# Altium PCB ALCT_MEZ_LX150T.PcbDoc (part 8 of 9)
Units mil, origin at the board's own origin, x right, y up, seen from the top; angles counter-clockwise.
Board outline 4101.98 x 5875.01 mil, 12 copper layers (Top Layer, Mid-Layer 1, +3V3, Mid-Layer 2, +1V2, Mid-Layer 4, +2V5, Mid-Layer 5, GND1, Mid-Layer 7, GND2, Bottom Layer), stack 64.7 mil thick; 378 components, 616 nets, 2492 pads, 1686 vias.
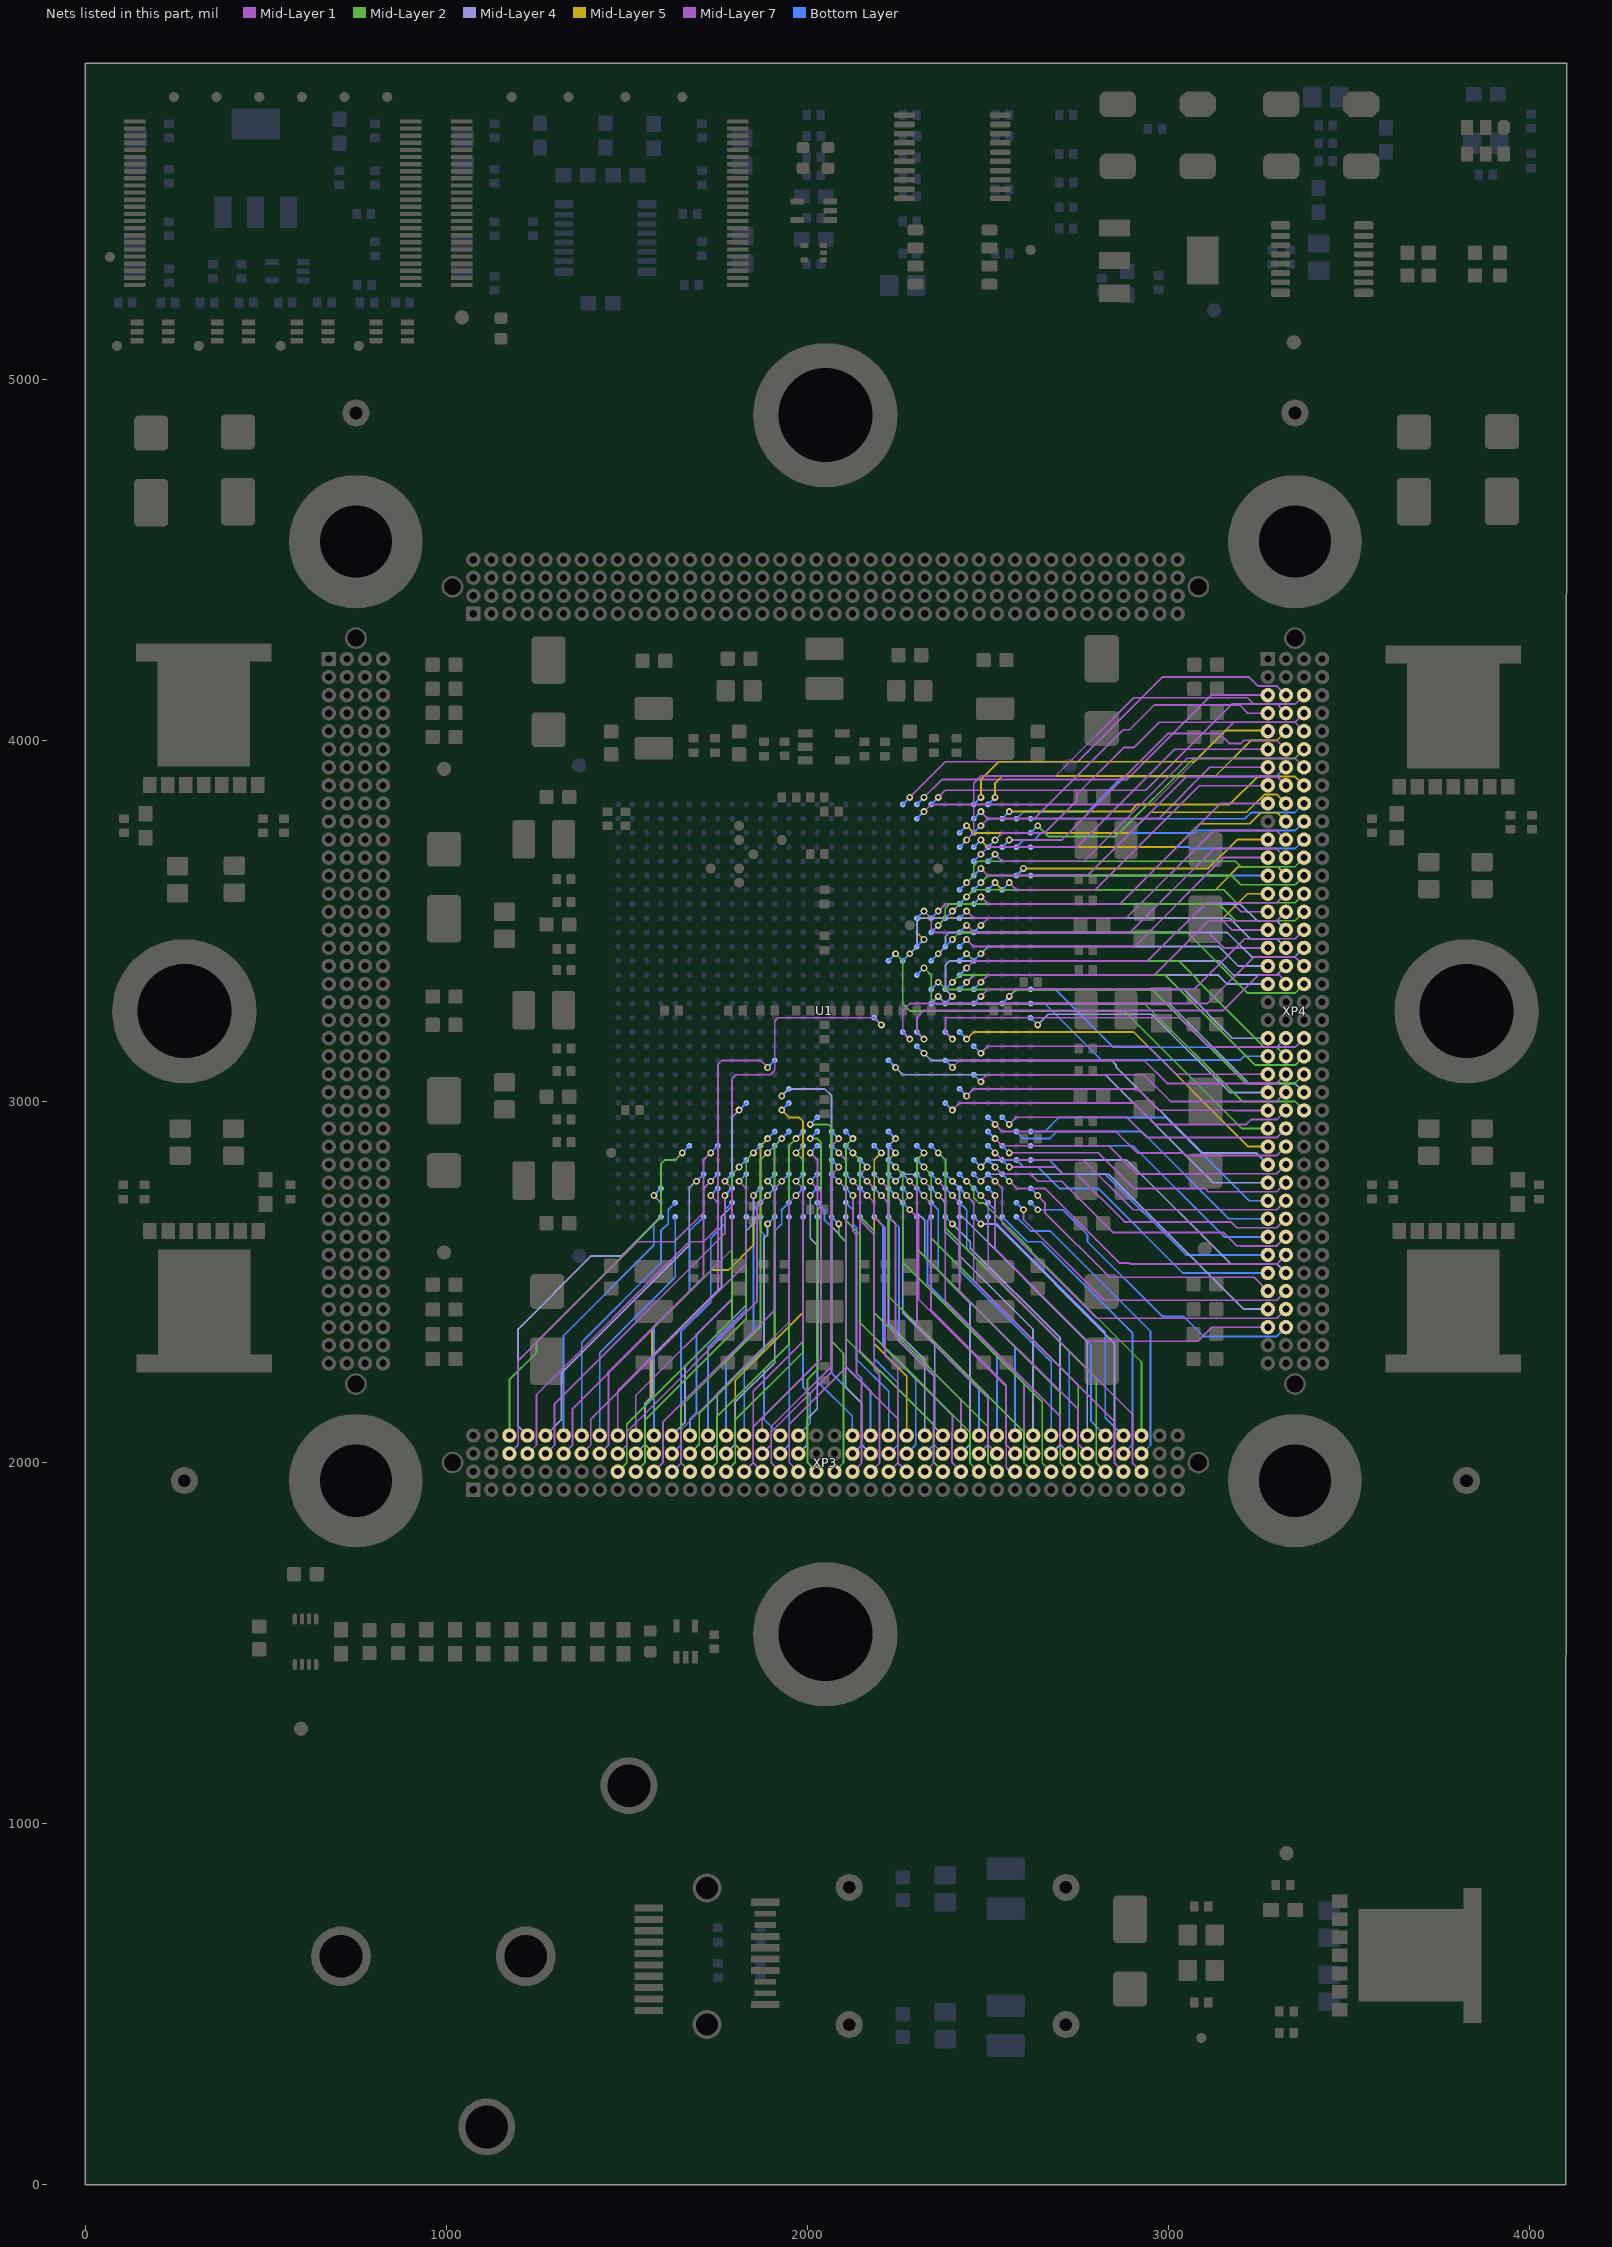
[diagram p17: the nets of this part, all layers, seen from the top]

## Via types
v1: diameter 19, hole 10, Top Layer to Bottom Layer, tented both sides, 1667 vias
v2: diameter 40, hole 20, Top Layer to Bottom Layer, 12 vias
v3: diameter 19, hole 10, Top Layer to Bottom Layer, 7 vias

## Nets (pads, with @x,y where several pads share a name; then routed paths per layer and width w, separated by ;. In a path a pad name is that pad's centre, name@x,y a point inside that pad or via, vN(x,y) a via of type N, cw(c..) or ccw(c..) an arc to the next point about the centre after c; other vN are vias at no path point) (continued)
XP3B_9: U1.AA5 XP3.B9 | length 1011.2
  Mid-Layer 2 w5: XP3.B9@1475,1973.83 XP3.B9@1475.59,1974.42 ; XP3.B9@1475,1975.01 1500,2000.01 1500,2105.7 1791.17,2396.86 1791.17,2798.44 v1(1811.03,2818.3)
  Bottom Layer w6: v1(1811.03,2818.3) U1.AA5@1830.71,2838
XP3B_10: U1.Y6 XP3.B10 | length 1045.3
  Mid-Layer 2 w5: XP3.B10@1525,1975.01 1550,2000.01 1550,2117.35 1830.54,2397.88 1830.54,2837.83 v1(1850.39,2857.68)
  Bottom Layer w6: v1(1850.39,2857.68) U1.Y6@1870.08,2877.37
XP3B_11: U1.V4 XP3.B11 | length 979.3
  Mid-Layer 1 w5: XP3.B11@1574.41,1974.42 XP3.B11@1575,1973.82 ; XP3.B11@1575,1975.01 1600,2000.01 1600,2112.19 1908.76,2420.96 1908.76,2591.93 1909.41,2592.58 1909.41,2759.2 v1(1929.14,2778.93)
  Bottom Layer w6: v1(1929.14,2778.93) U1.V4@1948.83,2798.62
XP3B_12: U1.U3 XP3.B12 | length 936.4
  Mid-Layer 1 w5: XP3.B12@1625,1973.82 1625.98,1973.82 1650,1997.84 1650,2090.34 1949,2389.34 1949,2720.06 v1(1968.51,2739.57)
  Bottom Layer w6: v1(1968.51,2739.57) U1.U3@1988.19,2759.26
XP3B_13: U1.W6 XP3.B13 | length 1021
  Mid-Layer 2 w5: XP3.B13@1674.41,1974.42 XP3.B13@1675,1973.83 ; XP3.B13@1675,1975.01 1650,2000.01 1650,2155.32 1869.9,2375.22 1869.9,2837.81 v1(1889.78,2857.68)
  Bottom Layer w6: v1(1889.78,2857.68) U1.W6@1909.45,2877.37
XP3B_14: U1.U7 XP3.B14 | length 1051.6
  Mid-Layer 2 w5: XP3.B14@1725,1973.83 XP3.B14@1725.59,1974.42 ; XP3.B14@1725,1975.01 1749.5,1999.51 1749.5,2126.87 1948.65,2326.02 1948.65,2877.19 v1(1968.51,2897.05)
  Bottom Layer w6: v1(1968.51,2897.05) U1.U7@1988.19,2916.74
XP3B_15: U1.U6 XP3.B15 | length 1007.7
  Mid-Layer 2 w5: XP3.B15@1775,1973.83 XP3.B15@1775.59,1974.42 ; XP3.B15@1775,1975.01 1800.5,2000.51 1800.5,2118.81 1988.01,2306.32 1988.01,2838.18 v1(1968.51,2857.68)
  Bottom Layer w6: v1(1968.51,2857.68) U1.U6@1988.19,2877.37
XP3B_16: U1.T6 XP3.B16 | length 1002.6
  Mid-Layer 7 w5: XP3.B16@1825,1975.01 1850,2000.01 1850,2099.41 2027.56,2276.98 2027.56,2838.13 v1@2008,2857.68 ; v1(2007.88,2857.68) v1@2007.94,2857.62
  Bottom Layer w6: v1(2007.88,2857.68) U1.T6@2027.56,2877.37
XP3B_17: U1.U4 XP3.B17 | length 907.5
  Mid-Layer 1 w5: XP3.B17@1875,1975.01 1850,2000.01 1850,2197.84 1988.14,2335.98 1988.14,2759.3 v1(1968.51,2778.93)
  Bottom Layer w6: v1(1968.51,2778.93) U1.U4@1988.19,2798.62
XP3B_18: U1.R5 XP3.B18 | length 958.8
  Mid-Layer 1 w5: XP3.B18@1925,1975.01 1900,2000.01 1900,2100.02 2067.11,2267.13 2067.11,2798.79 v1(2086.63,2818.3)
  Bottom Layer w6: U1.R5@2066.93,2838 v1(2086.63,2818.3)
XP3B_19: U1.R4 XP3.B19 | length 914.9
  Mid-Layer 1 w5: XP3.B19@1975,1975.01 1975,1975.2 1950,2000.2 1950,2106.76 2106.14,2262.9 2106.14,2759.43 v1(2086.63,2778.93)
  Bottom Layer w6: U1.R4@2066.94,2798.62 v1(2086.63,2778.93)
XP3B_20: U1.T7 XP3.B20 | length 1000
  Mid-Layer 2 w5: v1(2007.88,2897.05) 2027.56,2897.05 2037.4,2887.21 2037.4,2710.05 2027.74,2700.39 2027.74,2424.61 2027.56,2424.61 2027.56,2257.29 2000.5,2230.23 2000.5,1999.51 XP3.B20@2025,1975.01 ; XP3.B20@2025,1973.83 XP3.B20@2025.59,1974.42
  Bottom Layer w6: v1(2007.88,2897.05) U1.T7@2027.56,2916.74
XP3B_21: U1.T8 XP3.B21 | length 1067.4
  Mid-Layer 2 w5: v1(2007.88,2936.42) 2057.09,2936.42 2066.93,2926.58 2066.93,2336.03 2100,2302.96 2100,2000.01 XP3.B21@2075,1975.01 ; XP3.B21@2075,1973.83 XP3.B21@2075.59,1974.42
  Bottom Layer w6: v1(2007.88,2936.42) U1.T8@2027.56,2956.11
XP3B_22: U1.P3 XP3.B22 | length 813.9
  Mid-Layer 1 w5: XP3.B22@2125,1973.83 2125.59,1974.42 2150,1998.83 2150,2233.27 2135.83,2247.45 2135.83,2631.32 2125.99,2641.15 v1(2125.99,2739.57)
  Bottom Layer w6: U1.P3@2106.3,2759.26 v1(2125.99,2739.57)
XP3B_23: U1.P4 XP3.B23 | length 874
  Mid-Layer 1 w5: v1(2125.99,2778.93) 2145.85,2759.08 2145.85,2670.5 2185.04,2631.3 2185.04,2257.29 2200,2242.33 2200,1998.83 2175.59,1974.42 XP3.B23@2175,1973.83
  Bottom Layer w6: U1.P4@2106.31,2798.62 v1(2125.99,2778.93)
XP3B_24: U1.N3 XP3.B24 | length 838.9
  Mid-Layer 1 w5: v1@2165.48,2739.57 2184.86,2720.18 2184.86,2680.7 2214.57,2650.99 2214.57,2296.66 2250,2261.23 2250,1998.83 2225.59,1974.42 XP3.B24@2225,1973.83
  Bottom Layer w6: U1.N3@2145.68,2759.25 v1(2165.36,2739.57)
XP3B_25: U1.R6 XP3.B25 | length 988.5
  Mid-Layer 7 w5: v1(2086.63,2857.68) 2106.3,2838.01 2106.3,2265.18 2250,2121.48 2250,2000.01 XP3.B25@2275,1975.01
  Bottom Layer w6: U1.R6@2066.93,2877.37 v1(2086.63,2857.68)
XP3B_26: U1.M3 XP3.B26 | length 865.8
  Mid-Layer 1 w5: v1(2204.73,2739.57) 2224.41,2719.89 2224.41,2680.52 2244.09,2660.83 2244.09,2345.87 2350,2239.97 2350,1998.82 XP3.B26@2325.59,1974.41 ; XP3.B26@2326.18,1975.01 XP3.B26@2325.59,1974.42 ; XP3.B26@2325.59,1974.42 2325,1973.83 XP3.B26@2325.59,1974.41
  Bottom Layer w6: U1.M3@2185.04,2759.26 v1(2204.73,2739.57)
XP3B_27: U1.R1 XP3.B27 | length 836.4
  Mid-Layer 2 w5: v1(2086.61,2660.82) 2086.61,2631.3 2106.3,2611.62 2106.3,2343.71 2200,2250.01 2204.12,2250.01 2349.5,2104.62 2349.5,2000.51 XP3.B27@2375,1975.01 ; XP3.B27@2374.41,1974.42 XP3.B27@2375,1973.83
  Bottom Layer w6: U1.R1@2066.93,2680.52 v1@2086.61,2660.83
XP3B_28: U1.N4 XP3.B28 | length 940.2
  Mid-Layer 7 w5: v1(2165.36,2778.93) 2185.04,2759.25 2185.04,2347.82 2401.57,2131.29 2401.57,2086.23 2400.5,2085.16 2400.5,1999.51 XP3.B28@2425,1975.01
  Bottom Layer w6: U1.N4@2145.68,2798.62 v1(2165.36,2778.93)
XP3B_29: U1.P7 XP3.B29 | length 1114
  Mid-Layer 2 w5: v1(2125.99,2897.05) 2106.49,2877.54 2106.49,2731.49 2107.22,2730.75 2107.22,2669.75 2145.67,2631.3 2145.67,2387.19 2236.02,2296.84 2237.81,2296.84 2450,2084.66 2450,1998.83 XP3.B29@2473.82,1975.01 ; XP3.B29@2475,1973.83 XP3.B29@2473.82,1975.01 ; XP3.B29@2475,1975.01 XP3.B29@2473.82,1975.01
  Bottom Layer w6: U1.P7@2106.3,2916.74 v1(2125.99,2897.05)
XP3B_30: U1.P6 XP3.B30 | length 1076.7
  Mid-Layer 2 w5: v1(2125.99,2857.68) 2145.85,2837.83 2145.85,2680.34 2185.04,2641.15 2185.04,2414.77 2499.82,2099.99 2500,2099.99 2500,2000.01 XP3.B30@2525,1975.01 ; XP3.B30@2524.41,1974.42 XP3.B30@2525,1973.83
  Bottom Layer w6: U1.P6@2106.3,2877.37 v1(2125.99,2857.68)
XP3B_31: U1.K2 XP3.B31 | length 882.9
  Mid-Layer 2 w5: XP3.B31@2574.41,1974.42 XP3.B31@2575,1973.83
  Mid-Layer 7 w5: v1(2283.46,2700.2) 2308.07,2675.59 2308.07,2451.68 2550.5,2209.25 2550.5,1985.33 2560.83,1975.01 XP3.B31@2575,1975.01
  Bottom Layer w6: U1.K2@2263.78,2719.89 v1(2283.46,2700.2)
XP3B_32: U1.L6 XP3.B32 | length 1087
  Mid-Layer 2 w5: v1(2244.09,2857.68) 2224.59,2838.18 2224.59,2460.07 2600.5,2084.16 2600.5,2075.2 ; 2600,2075.2 2600,1998.83 XP3.B32@2623.82,1975.01 ; XP3.B32@2625,1973.83 XP3.B32@2623.82,1975.01 ; XP3.B32@2625,1975.01 XP3.B32@2623.82,1975.01
  Bottom Layer w6: U1.L6@2224.41,2877.37 v1(2244.09,2857.68)
XP3B_33: U1.L5 XP3.B33 | length 1052.6
  Mid-Layer 2 w5: v1(2244.09,2818.3) 2263.96,2798.43 2263.96,2708.28 2263.96,2692.13 2263.96,2554.33 2561.19,2257.1 2562.21,2257.1 2573.63,2245.68 2573.63,2244.66 2650,2168.3 2650,1998.83 XP3.B33@2673.82,1975.01 ; XP3.B33@2675,1973.83 XP3.B33@2673.82,1975.01 ; XP3.B33@2675,1975.01 XP3.B33@2673.82,1975.01
  Bottom Layer w6: U1.L5@2224.41,2838 v1(2244.09,2818.3)
XP3B_34: U1.J6 XP3.B34 | length 1095.6
  Mid-Layer 2 w5: v1(2322.84,2857.68) 2303.33,2838.17 2303.33,2591.76 2700,2195.08 2700,1998.83 XP3.B34@2723.82,1975.01 ; XP3.B34@2725,1973.83 XP3.B34@2723.82,1975.01 ; XP3.B34@2725,1975.01 XP3.B34@2723.82,1975.01
  Bottom Layer w6: U1.J6@2303.15,2877.37 v1(2322.84,2857.68)
XP3B_35: U1.J5 XP3.B35 | length 1059.3
  Mid-Layer 2 w5: v1(2322.84,2818.3) 2342.7,2798.44 2342.7,2621.28 2750,2213.98 2750,2000.01 XP3.B35@2775,1975.01 ; XP3.B35@2774.41,1974.42 XP3.B35@2775,1973.83
  Bottom Layer w6: U1.J5@2303.15,2838 v1(2322.84,2818.3)
XP3B_36: U1.H6 XP3.B36 | length 1103
  Mid-Layer 2 w5: v1(2362.21,2857.68) 2382.07,2837.83 2382.07,2650.81 2800,2232.88 2800,2000.01 XP3.B36@2825,1975.01 ; XP3.B36@2824.41,1974.42 XP3.B36@2825,1973.83
  Bottom Layer w6: U1.H6@2342.52,2877.37 v1(2362.21,2857.68)
XP3B_37: U1.F3 XP3.B37 | length 975.1
  Mid-Layer 1 w5: v1(2440.94,2739.57) 2460.63,2719.88 2460.63,2503.35 2850.5,2113.48 2850,2112.98 2850,2000.01 XP3.B37@2875,1975.01 ; XP3.B37@2875.59,1974.41 2875,1973.82 XP3.B37@2876.18,1975.01
  Bottom Layer w6: U1.F3@2421.26,2759.26 v1(2440.94,2739.57)
XP3B_38: U1.E3 XP3.B38 | length 977.4
  Mid-Layer 1 w5: v1(2480.33,2739.57) 2500.7,2719.2 2500.7,2533.96 2900,2134.66 2900,2000.01 XP3.B38@2925,1975.01 ; XP3.B38@2925,1973.82 XP3.B38@2925.59,1974.41
  Bottom Layer w6: U1.E3@2460.63,2759.26 v1(2480.33,2739.57)
XP3C_3: U1.AC4 XP3.C3 | length 1074.2
  Mid-Layer 1 w5: XP3.C3@1174.41,2024.42 XP3.C3@1175,2023.82 ; XP3.C3@1175,2025.01 1199.5,2049.51 1199.5,2247.45 1198.51,2248.43 1198.51,2280.47 1529.66,2611.62 1631.92,2611.62 1712.79,2692.49 1712.79,2759.43 v1(1732.29,2778.93)
  Bottom Layer w6: v1(1732.29,2778.93) U1.AC4@1751.98,2798.62
XP3C_4: U1.AC3 XP3.C4 | length 992.9
  Mid-Layer 1 w5: XP3.C4@1225,2023.82 1250,2048.82 1250,2188.39 1673.04,2611.43 1712.41,2611.43 1751.8,2650.82 1751.8,2720.06 v1(1732.29,2739.57)
  Bottom Layer w6: v1(1732.29,2739.57) U1.AC3@1751.98,2759.25
XP3C_5: U1.AB3 XP3.C5 | length 950.1
  Mid-Layer 1 w5: XP3.C5@1274.41,2024.42 1275,2023.83 1300,2048.82 1300,2162.62 1771.66,2634.28 v1(1771.66,2739.57)
  Bottom Layer w6: v1(1771.66,2739.57) U1.AB3@1791.34,2759.26
XP3C_6: U1.AB4 XP3.C6 | length 983
  Mid-Layer 1 w5: XP3.C6@1325,2025.01 1350,2050.01 1350,2148.65 1791.29,2589.94 1791.29,2759.3 v1(1771.66,2778.93)
  Bottom Layer w6: v1(1771.66,2778.93) U1.AB4@1791.34,2798.62
XP3C_7: U1.AA4 XP3.C7 | length 979.7
  Mid-Layer 1 w5: XP3.C7@1375,2023.82 1400,2048.82 1400,2119.91 1830.53,2550.44 1830.53,2759.43 v1(1811.03,2778.93)
  Bottom Layer w6: v1(1811.03,2778.93) U1.AA4@1830.71,2798.62
XP3C_8: U1.AC6 XP3.C8 | length 987.8
  Mid-Layer 7 w5: XP3.C8@1425,2025.01 1449.5,2049.51 1449.5,2252.05 1712.6,2515.14 1712.6,2837.99 v1(1732.29,2857.68)
  Bottom Layer w6: v1(1732.29,2857.68) U1.AC6@1751.98,2877.37
XP3C_9: U1.W3 XP3.C9 | length 915.4
  Mid-Layer 1 w5: XP3.C9@1475,2023.82 1475.59,2024.41 1500,2048.82 1500,2084.66 1860.24,2444.89 1860.24,2710.03 v1(1889.78,2739.57)
  Bottom Layer w6: v1(1889.78,2739.57) U1.W3@1909.45,2759.26
XP3C_10: U1.AA9 XP3.C10 | length 1097.1
  Mid-Layer 4 w5: XP3.C10@1525,2025.01 1550.01,2050.02 1550.01,2163.6 1564.78,2178.36 1564.78,2288.58 1761.81,2485.62 1761.81,2680.52 1791.34,2710.05 1791.34,2956.09 v1(1811.03,2975.78)
  Bottom Layer w6: v1(1811.03,2975.78) U1.AA9@1830.71,2995.48
XP3C_11: U1.W7 XP3.C11 | length 1078.3
  Mid-Layer 5 w5: XP3.C11@1575,2025.01 1550.5,2049.51 1550.5,2164.09 1569.88,2183.47 1569.88,2368.53 1734.23,2532.88 1781.5,2532.88 1850.39,2601.78 1850.39,2670.67 1870.08,2690.36 1870.08,2877.35 v1(1889.78,2897.05)
  Bottom Layer w6: v1(1889.78,2897.05) U1.W7@1909.45,2916.74
XP3C_12: U1.AB2 XP3.C12 | length 764.6
  Bottom Layer w5: XP3.C12@1625,2023.83 XP3.C12@1625.59,2024.42 ; XP3.C12@1625,2025.01 1650,2050.01 1650,2362.01 1732.28,2444.3 1732.28,2621.46 1771.65,2660.83 1771.65,2700.19 U1.AB2@1791.34,2719.89
XP3C_13: U1.V7 XP3.C13 | length 1005.2
  Mid-Layer 2 w5: XP3.C13@1675,2025.01 1700.5,2050.51 1700.5,2136.92 1909.28,2345.71 1909.28,2877.19 v1(1929.14,2897.05)
  Bottom Layer w6: v1(1929.14,2897.05) U1.V7@1948.82,2916.74
XP3C_14: U1.W1 XP3.C14 | length 731.9
  Mid-Layer 4 w5: XP3.C14@1725,2025.01 1750.5,2050.51 1750.5,2190.84 1879.92,2320.26 1879.92,2621.46 1889.76,2631.3 v1(1889.76,2660.83)
  Bottom Layer w6: v1(1889.76,2660.83) U1.W1@1909.45,2680.52
XP3C_15: U1.W4 XP3.C15 | length 845.6
  Mid-Layer 4 w5: XP3.C15@1775,2025.01 1800.5,2050.51 1800.5,2168.03 1909.45,2276.97 1909.45,2759.26 v1(1889.78,2778.93)
  Bottom Layer w6: v1(1889.78,2778.93) U1.W4@1909.46,2798.62
XP3C_16: U1.V9 XP3.C16 | length 1108.2
  Mid-Layer 5 w5: XP3.C16@1824.41,2024.42 XP3.C16@1825,2023.83 ; XP3.C16@1825,2025.01 1800,2050.01 1800,2227.26 1987.51,2414.77 1987.51,2670.67 1988.01,2671.17 1988.01,2944.28 1988,2944.5 1976.58,2955.92 1949,2955.92 v1(1929.14,2975.78)
  Bottom Layer w6: v1(1929.14,2975.78) U1.V9@1948.82,2995.48
XP3C_17: U1.R7 XP3.C17 | length 987.5
  Mid-Layer 7 w5: XP3.C17@1875,2025.01 1900,2050.01 1900,2084.66 2066.93,2251.59 2066.93,2877.35 v1(2086.63,2897.05)
  Bottom Layer w6: U1.R7@2066.93,2916.74 v1(2086.63,2897.05)
XP3C_18: U1.V1 XP3.C18 | length 667.2
  Bottom Layer w5: XP3.C18@1925,2023.83 XP3.C18@1925.59,2024.42 ; XP3.C18@1925,2025.01 1950,2050.01 1950,2679.34 U1.V1@1948.82,2680.52
XP3C_19: U1.T3 XP3.C19 | length 772.2
  Mid-Layer 4 w5: XP3.C19@1975,2025.01 1999.5,2049.51 1999.5,2120.96 2027.37,2148.84 2027.37,2601.96 2007.88,2621.45 v1(2007.88,2739.58)
  Bottom Layer w6: v1(2007.88,2739.58) U1.T3@2027.56,2759.26
XP3C_22: U1.T2 XP3.C22 | length 758
  Bottom Layer w5: U1.T2@2027.56,2719.89 2047.19,2700.26 2047.19,2672.67 2066.93,2652.93 2066.93,2247.45 2150,2164.38 2150,2048.82 2125,2023.82 XP3.C22@2124.41,2024.42
XP3C_23: U1.V10 XP3.C23 | length 1216.7
  Mid-Layer 4 w5: v1(1929.14,3015.15) 1948.62,3034.65 2047.44,3034.65 2066.93,3015.16 2066.93,2652.93 2106.3,2613.56 2106.3,2208.08 2150.5,2163.88 2150.5,2049.51 XP3.C23@2175,2025.01
  Bottom Layer w6: v1(1929.14,3015.15) U1.V10@1948.82,3034.85
XP3C_24: U1.N1 XP3.C24 | length 711.1
  Bottom Layer w5: U1.N1@2145.67,2680.52 2184.85,2641.33 2184.85,2287 2250,2221.86 2250,2048.82 2225,2023.82 XP3.C24@2224.41,2024.42
XP3C_25: U1.M1 XP3.C25 | length 713.5
  Bottom Layer w5: U1.M1@2185.04,2680.52 2209.65,2655.92 2209.65,2321.27 2300,2230.91 2300,2050.01 XP3.C25@2275,2025.01
XP3C_26: U1.L1 XP3.C26 | length 718.7
  Bottom Layer w5: U1.L1@2224.41,2680.52 2253.94,2650.99 2253.94,2336.03 2350,2239.97 2350,2050.01 XP3.C26@2325,2025.01 ; XP3.C26@2324.41,2024.42 XP3.C26@2325,2023.82
XP3C_27: U1.N5 XP3.C27 | length 924.1
  Mid-Layer 7 w5: v1(2165.36,2818.3) 2145.85,2798.79 2145.85,2308.27 2350.5,2103.62 2350.5,2049.51 XP3.C27@2375,2025.01
  Bottom Layer w6: U1.N5@2145.68,2837.98 v1(2165.36,2818.3)
XP3C_28: U1.L4 XP3.C28 | length 932.8
  Mid-Layer 4 w5: v1(2244.09,2778.93) 2263.59,2798.43 2291.55,2798.43 2302.98,2787.01 2302.98,2692.49 2324.79,2670.68 2324.79,2568.35 2450,2443.13 2450,2050.01 XP3.C28@2425,2025.01
  Bottom Layer w6: U1.L4@2224.41,2798.62 v1(2244.09,2778.93)
XP3C_29: U1.K3 XP3.C29 | length 858.2
  Mid-Layer 7 w5: v1(2283.48,2739.57) 2263.96,2720.05 2263.96,2421.46 2499.5,2185.92 2499.5,2049.51 XP3.C29@2475,2025.01
  Bottom Layer w6: U1.K3@2263.78,2759.26 v1(2283.48,2739.57)
XP3C_30: U1.K4 XP3.C30 | length 881.8
  Mid-Layer 1 w5: v1(2283.48,2778.93) 2303.11,2759.3 2303.11,2375.44 2500,2178.55 2500,2050.01 XP3.C30@2525,2025.01
  Bottom Layer w6: U1.K4@2263.79,2798.62 v1(2283.48,2778.93)
XP3C_31: U1.J3 XP3.C31 | length 848.5
  Mid-Layer 1 w5: v1(2322.84,2739.57) 2322.84,2737.04 2342.52,2717.36 2342.52,2421.64 2550,2214.16 2550,2050.01 XP3.C31@2575,2025.01 ; XP3.C31@2574.41,2024.42 2575,2023.82 XP3.C31@2575.59,2024.42
  Bottom Layer w6: U1.J3@2303.15,2759.26 v1(2322.84,2739.57)
XP3C_32: U1.J4 XP3.C32 | length 906.9
  Mid-Layer 7 w5: v1(2322.84,2778.93) 2342.52,2759.26 2342.52,2476.8 2600,2219.32 2600,2050.01 XP3.C32@2625,2025.01
  Bottom Layer w6: U1.J4@2303.16,2798.62 v1(2322.84,2778.93)
XP3C_33: U1.G1 XP3.C33 | length 797.2
  Mid-Layer 4 w5: v1(2401.57,2660.83) 2450.79,2611.62 2450.79,2593.89 2699.5,2345.17 2699.5,2049.51 XP3.C33@2675,2025.01
  Bottom Layer w5: U1.G1@2381.89,2680.52 v1(2401.57,2660.83)
XP3C_34: U1.H4 XP3.C34 | length 932.9
  Mid-Layer 1 w5: v1(2362.21,2778.93) 2381.84,2759.3 2381.84,2446.3 2699.5,2128.64 2699.5,2050.51 XP3.C34@2725,2025.01 ; XP3.C34@2724.41,2024.42 XP3.C34@2725,2023.82
  Bottom Layer w6: U1.H4@2342.53,2798.62 v1(2362.21,2778.93)
XP3C_35: U1.G3 XP3.C35 | length 897.9
  Mid-Layer 1 w5: v1(2401.58,2739.57) 2401.58,2738.45 2421.08,2718.95 2421.08,2475.95 2749.5,2147.54 2749.5,2050.51 XP3.C35@2775,2025.01 ; XP3.C35@2775,2023.83 XP3.C35@2775.59,2024.42
  Bottom Layer w6: U1.G3@2381.89,2759.26 v1(2401.58,2739.57)
XP3C_36: U1.E1 XP3.C36 | length 850.5
  Mid-Layer 4 w5: v1(2480.32,2660.83) 2519.68,2660.83 2850,2330.52 2850,2050.01 XP3.C36@2825,2025.01
  Bottom Layer w5: U1.E1@2460.82,2680.33 U1.E1@2460.63,2680.52 v1(2480.32,2660.83)
XP3C_37: U1.C1 XP3.C37 | length 840.3
  Bottom Layer w5: U1.C1@2539.37,2680.52 2608.27,2611.62 2647.64,2611.62 2900,2359.26 2900,2048.82 2875,2023.82 XP3.C37@2875.59,2024.42
XP3C_38: U1.B1 XP3.C38 | length 853.4
  Bottom Layer w5: U1.B1@2578.74,2680.52 2617.93,2641.33 2672.06,2641.33 2950,2363.39 2950,2048.82 2925,2023.82 XP3.C38@2925.59,2024.42
XP3D_3: U1.AE6 XP3.D3 | length 1024.9
  Mid-Layer 2 w5: XP3.D3@1175,2075.01 1175,2229.49 1250,2304.49 1250,2334.08 1594.49,2678.57 1594.49,2826.19 1606.1,2837.8 1633.68,2837.8 v1(1653.56,2857.68)
  Bottom Layer w6: v1(1653.56,2857.68) U1.AE6@1673.23,2877.37
XP3D_4: U1.AG3 XP3.D4 | length 924.6
  Mid-Layer 4 w5: XP3.D4@1225,2075.01 1199,2101 1199,2369.68 1401.57,2572.25 1486.22,2572.25 1594.31,2680.34 1594.31,2720.06 v1(1574.81,2739.57)
  Bottom Layer w6: v1(1574.81,2739.57) U1.AG3@1594.49,2759.26
XP3D_5: U1.AD4 XP3.D5 | length 903.8
  Mid-Layer 4 w5: XP3.D5@1275,2075.01 1318.9,2118.9 1318.9,2247.71 1673.06,2601.88 1673.06,2761.48 v1@1690.43,2778.85
  Bottom Layer w6: v1(1692.93,2778.93) U1.AD4@1712.61,2798.62
XP3D_6: U1.AG1 XP3.D6 | length 718.3
  Bottom Layer w5: XP3.D6@1325,2073.82 XP3.D6@1325,2075.01 1325,2351.97 1574.8,2601.78 1574.8,2660.83 U1.AG1@1594.49,2680.52
XP3D_7: U1.AF2 XP3.D7 | length 753.3
  Bottom Layer w5: XP3.D7@1375,2073.82 XP3.D7@1375,2075.01 1375,2333.08 1594.49,2552.56 1594.49,2641.83 1614.5,2661.84 1614.5,2700.53 U1.AF2@1633.86,2719.89
XP3D_8: U1.AF1 XP3.D8 | length 693.2
  Bottom Layer w5: XP3.D8@1425,2073.82 XP3.D8@1425,2075.01 1425,2304.34 1633.86,2513.19 U1.AF1@1633.86,2680.52
XP3D_9: U1.W12 XP3.D9 | length 1320
  Mid-Layer 7 w5: XP3.D9@1475,2075.01 1475,2198.81 1752.16,2475.97 1752.16,3101.98 1763.58,3113.4 1870.28,3113.4 v1(1889.78,3093.9)
  Bottom Layer w6: v1(1889.78,3093.9) U1.W12@1909.45,3113.59
XP3D_10: U1.M15 XP3.D10 | length 1696.7
  Mid-Layer 7 w5: XP3.D10@1525,2075.01 1525,2185.85 1791.53,2452.38 1791.53,2583.85 1791.52,2600.01 1791.53,3062.61 1802.95,3074.03 1897.49,3074.03 1909.64,3086.19 1909.64,3222.05 1919.09,3231.5 2185.23,3231.5 v1(2204.73,3212)
  Bottom Layer w6: U1.M15@2185.04,3231.7 v1(2204.73,3212)
XP3D_11: U1.AD1 XP3.D11 | length 663.7
  Bottom Layer w5: XP3.D11@1575,2073.82 XP3.D11@1575,2075.01 1575,2375.6 1673.23,2473.82 1673.23,2641.15 U1.AD1@1712.6,2680.52
XP3D_12: U1.Y3 XP3.D12 | length 785.8
  Mid-Layer 4 w5: XP3.D12@1625,2075.01 1661.44,2111.44 1661.44,2267.13 1830.71,2436.4 1830.71,2641.15 1850.39,2660.83 v1(1850.39,2739.57)
  Bottom Layer w6: v1(1850.39,2739.57) U1.Y3@1870.08,2759.26
XP3D_13: U1.AB1 XP3.D13 | length 654.5
  Bottom Layer w5: XP3.D13@1675,2073.82 XP3.D13@1675.59,2074.41 ; XP3.D13@1675,2075.01 1675,2121.27 1692.91,2139.18 1692.91,2355.71 1791.34,2454.14 U1.AB1@1791.34,2680.52
XP3D_14: U1.AA1 XP3.D14 | length 649.3
  Bottom Layer w5: XP3.D14@1725,2075.01 1725,2318.9 1830.71,2424.61 U1.AA1@1830.71,2680.52
XP3D_15: U1.Y2 XP3.D15 | length 685.4
  Bottom Layer w5: XP3.D15@1775,2073.82 XP3.D15@1775,2075.01 1775,2287.19 1850.39,2362.59 1850.39,2700.2
  Bottom Layer w6: 1850.39,2700.2 U1.Y2@1870.08,2719.89
XP3D_16: U1.Y1 XP3.D16 | length 633.2
  Bottom Layer w5: XP3.D16@1825,2073.82 XP3.D16@1825.59,2074.41 ; XP3.D16@1825,2075.01 1825,2256.5 1879.92,2311.42 1879.92,2631.3 1870.08,2641.15 U1.Y1@1870.08,2680.52
XP3D_17: U1.T4 XP3.D17 | length 811.3
  Mid-Layer 1 w5: XP3.D17@1875,2075.01 1875,2124.41 2037.4,2286.82 2037.4,2749.42 v1(2007.88,2778.93)
  Bottom Layer w6: v1(2007.88,2778.93) U1.T4@2027.56,2798.62
XP3D_18: U1.V2 XP3.D18 | length 693.3
  Bottom Layer w5: XP3.D18@1925,2073.82 XP3.D18@1925,2075.01 1879.92,2120.08 1879.92,2257.1 1909.63,2286.82 1909.63,2641.33 1929.15,2660.84 1929.15,2700.2
  Bottom Layer w6: 1929.15,2700.2 U1.V2@1948.82,2719.89
XP3D_19: U1.U1 XP3.D19 | length 627.3
  Bottom Layer w5: XP3.D19@1975,2075.01 1975,2076.78 2007.87,2109.65 2007.87,2188.39 1988.19,2208.08 U1.U1@1988.19,2680.52
XP3D_22: U1.T1 XP3.D22 | length 647.1
  Bottom Layer w5: U1.T1@2027.56,2680.52 2027.56,2225.81 2124.41,2128.96 2124.41,2074.42 XP3.D22@2125,2073.82
XP3D_23: U1.P1 XP3.D23 | length 635.2
  Bottom Layer w5: U1.P1@2106.3,2680.52 2106.3,2267.13 2175,2198.43 XP3.D23@2175,2075.01 XP3.D23@2175,2073.82
XP3D_24: U1.P2 XP3.D24 | length 695.2
  Bottom Layer w5: U1.P2@2106.3,2719.89 2125.98,2700.2 2125.98,2660.83 2135.83,2650.99 2135.83,2286.82 2225,2197.64 XP3.D24@2225,2075.01 XP3.D24@2225,2073.82
XP3D_25: U1.M6 XP3.D25 | length 855.9
  Mid-Layer 5 w5: v1(2204.73,2857.68) 2185.04,2837.99 2185.04,2328.65 2275,2238.69 XP3.D25@2275,2075.01
  Bottom Layer w6: U1.M6@2185.04,2877.37 v1(2204.73,2857.68)
XP3D_26: U1.L7 XP3.D26 | length 900.9
  Mid-Layer 4 w5: v1(2244.09,2897.05) 2224.59,2877.55 2224.59,2680.7 2224.41,2680.52 2224.41,2385.24 2325,2284.65 XP3.D26@2325,2075.01 XP3.D26@2325,2073.82
  Bottom Layer w6: U1.L7@2224.41,2916.74 v1(2244.09,2897.05)
XP3D_27: U1.L3 XP3.D27 | length 746.6
  Mid-Layer 4 w5: v1(2244.09,2739.57) 2263.78,2719.88 2263.78,2414.77 2352.36,2326.19 2352.36,2097.64 XP3.D27@2375,2075.01
  Bottom Layer w6: U1.L3@2224.41,2759.26 v1(2244.09,2739.57)
XP3D_28: U1.M4 XP3.D28 | length 823
  Mid-Layer 7 w5: v1(2204.73,2778.93) 2224.41,2759.25 2224.41,2375.4 2425,2174.81 XP3.D28@2425,2075.01
  Bottom Layer w6: U1.M4@2185.04,2798.62 v1(2204.73,2778.93)
XP3D_29: U1.J1 XP3.D29 | length 677.9
  Bottom Layer w5: U1.J1@2303.15,2680.52 2303.15,2375.4 2475,2203.55 XP3.D29@2475,2075.01 XP3.D29@2475,2073.82
XP3D_30: U1.H1 XP3.D30 | length 690.4
  Bottom Layer w5: U1.H1@2342.52,2680.52 2332.68,2670.67 2332.68,2493.51 2525,2301.19 XP3.D30@2525,2075.01 XP3.D30@2525,2073.82
XP3D_31: U1.H2 XP3.D31 | length 742.4
  Bottom Layer w5: U1.H2@2342.52,2719.89 2362.2,2700.2 2362.2,2532.88 2575,2320.08 XP3.D31@2575,2075.01 XP3.D31@2575,2073.82
XP3D_32: U1.H3 XP3.D32 | length 801.2
  Mid-Layer 4 w5: v1(2362.21,2739.57) 2381.2,2720.57 2381.2,2639.88 2421.07,2600.01 2421.07,2572.43 2625,2368.51 XP3.D32@2625,2075.01
  Bottom Layer w6: U1.H3@2342.52,2759.26 v1(2362.21,2739.57)
XP3D_33: U1.F1 XP3.D33 | length 711.8
  Bottom Layer w5: U1.F1@2421.26,2680.52 2421.26,2532.88 2675,2279.14 XP3.D33@2675,2075.01 XP3.D33@2675,2073.82
XP3D_34: U1.F2 XP3.D34 | length 771.9
  Bottom Layer w5: U1.F2@2421.26,2719.89 2440.94,2700.2 2440.94,2591.94 2725,2307.88 XP3.D34@2725,2075.01 XP3.D34@2725,2073.82
XP3D_35: U1.G4 XP3.D35 | length 886.4
  Mid-Layer 4 w5: v1(2401.58,2778.93) 2421.44,2759.07 2421.44,2688.22 2775,2334.67 XP3.D35@2775,2075.01
  Bottom Layer w6: U1.G4@2381.89,2798.62 v1(2401.58,2778.93)
XP3D_36: U1.D1 XP3.D36 | length 740.1
  Bottom Layer w5: U1.D1@2500,2680.52 2500,2609.67 2785.43,2324.24 2785.43,2114.57 XP3.D36@2825,2075.01
XP3D_37: U1.D2 XP3.D37 | length 802.6
  Bottom Layer w5: U1.D2@2500,2719.89 2519.68,2700.2 2519.68,2665.75 2824.8,2360.64 2824.8,2124.02 2875,2073.82 XP3.D37@2875,2075.01
XP3D_38: U1.F4 XP3.D38 | length 939.9
  Mid-Layer 2 w5: v1(2440.94,2778.93) 2460.44,2759.43 2460.44,2733.29 2475.03,2718.7 2487.99,2718.7 2619.3,2587.4 2619.3,2584.27 2925,2278.57 XP3.D38@2925,2075.01
  Bottom Layer w6: U1.F4@2421.26,2798.62 v1(2440.94,2778.93)
XP4A_3: U1.J30 XP4.A3 | length 1097.3
  Mid-Layer 7 w5: v1(2322.83,3841.93) 2372.05,3891.15 2883.86,3891.15 3117.72,4125.01 XP4.A3@3275,4125.01
  Bottom Layer w6: U1.J30@2303.15,3822.25 v1(2322.83,3841.93)
XP4A_4: U1.E28 XP4.A4 | length 970.4
  Mid-Layer 1 w5: v1(2480.32,3763.19) v1@2480.38,3763.25 ; v1@2480.44,3763.19 2500.13,3782.88 2627.95,3782.88 2874.02,4028.94 2891.75,4028.94 2960.46,4097.66 3196.67,4097.66 3219.31,4075.01 XP4.A4@3275,4075.01
  Bottom Layer w6: U1.E28@2460.63,3743.51 v1(2480.32,3763.19)
XP4A_5: U1.E30 XP4.A5 | length 929.1
  Mid-Layer 5 w5: v1(2480.32,3841.93) 2480.32,3891.15 2529.53,3940.36 3070.87,3940.36 3157.76,4027.26 3272.75,4027.26 XP4.A5@3275,4025.01
  Bottom Layer w6: U1.E30@2460.63,3822.25 v1(2480.32,3841.93)
XP4A_6: U1.E26 XP4.A6 | length 942.9
  Mid-Layer 1 w5: v1(2480.33,3684.45) 2500.06,3704.19 2746.11,3704.19 3016.93,3975.01 XP4.A6@3275,3975.01
  Bottom Layer w6: U1.E26@2460.63,3664.77 v1(2480.33,3684.45)
XP4A_7: U1.E29 XP4.A7 | length 889.4
  Mid-Layer 7 w5: v1(2480.32,3802.56) 2499.83,3783.05 2972.61,3783.05 3114.57,3925.01 XP4.A7@3275,3925.01
  Bottom Layer w6: U1.E29@2460.63,3782.88 v1(2480.32,3802.56)
XP4A_8: U1.C24 XP4.A8 | length 871
  Mid-Layer 1 w5: v1(2559.06,3605.7) 2578.57,3586.19 2797.39,3586.19 3085.02,3873.82 XP4.A8@3275,3873.82
  Bottom Layer w6: U1.C24@2539.38,3586.02 v1(2559.06,3605.7)
XP4A_9: U1.E23 XP4.A9 | length 945.8
  Mid-Layer 1 w5: v1(2480.33,3566.33) 2499.84,3546.83 2866.29,3546.83 3144.47,3825.01 XP4.A9@3275,3825.01
  Bottom Layer w6: U1.E23@2460.63,3546.66 v1(2480.33,3566.33)
XP4A_11: U1.B25 XP4.A11 | length 737.5
  Mid-Layer 5 w5: v1(2598.43,3645.08) 3110.24,3645.08 3190.16,3725.01 XP4.A11@3275,3725.01
  Bottom Layer w6: U1.B25@2578.74,3625.4 v1(2598.43,3645.08)
XP4A_12: U1.F20 XP4.A12 | length 972
  Mid-Layer 1 w5: v1(2440.94,3448.19) 2460.45,3428.68 2905.63,3428.68 3151.95,3675.01 XP4.A12@3275,3675.01
  Bottom Layer w6: U1.F20@2421.26,3428.52 v1(2440.94,3448.19)
XP4A_13: U1.A25 XP4.A13 | length 657.2
  Bottom Layer w5: U1.A25@2618.11,3625.4 2618.3,3625.21 3275,3625.21 XP4.A13@3275,3625.01
XP4A_14: U1.J20 XP4.A14 | length 1089
  Mid-Layer 5 w5: v1(2322.84,3448.19) 2303.34,3467.68 2303.34,3497.64 2312.99,3507.29 3150.79,3507.29 3218.5,3575.01 XP4.A14@3275,3575.01
  Bottom Layer w6: U1.J20@2303.16,3428.52 v1(2322.84,3448.19)
XP4A_15: U1.H22 XP4.A15 | length 957.6
  Mid-Layer 7 w5: v1(2362.21,3526.97) 2381.72,3546.47 3179.32,3546.47 3200.79,3525.01 XP4.A15@3275,3525.01
  Bottom Layer w6: U1.H22@2342.52,3507.29 v1(2362.21,3526.97)
XP4A_16: U1.E21 XP4.A16 | length 844
  Mid-Layer 7 w5: v1(2480.33,3487.6) 2500.02,3507.29 3142.72,3507.29 3175,3475.01 XP4.A16@3275,3475.01
  Bottom Layer w6: U1.E21@2460.63,3467.92 v1(2480.33,3487.6)
XP4A_17: U1.J22 XP4.A17 | length 1038.4
  Mid-Layer 7 w5: v1(2322.84,3526.97) 2342.71,3507.1 2342.71,3479.52 2354.32,3467.92 3110.24,3467.92 3153.15,3425.01 XP4.A17@3275,3425.01
  Bottom Layer w6: U1.J22@2303.15,3507.29 v1(2322.84,3526.97)
XP4A_18: U1.E19 XP4.A18 | length 852.8
  Mid-Layer 4 w5: v1(2480.32,3408.84) 2500.03,3428.55 3139.76,3428.55 3193.31,3375.01 XP4.A18@3275,3375.01
  Bottom Layer w6: U1.E19@2460.63,3389.18 v1(2480.32,3408.84)
XP4A_19: U1.F17 XP4.A19 | length 880.2
  Mid-Layer 4 w5: v1(2440.94,3330.12) 2460.45,3349.62 3138,3349.62 3162.62,3325.01 XP4.A19@3275,3325.01
  Bottom Layer w6: U1.F17@2421.26,3310.44 v1(2440.94,3330.12)
XP4A_22: U1.C16 XP4.A22 | length 807.9
  Mid-Layer 4 w5: v1(2559.06,3290.75) 2578.55,3310.25 3041.51,3310.25 3176.75,3175.01 XP4.A22@3275,3175.01
  Bottom Layer w6: U1.C16@2539.37,3271.07 v1(2559.06,3290.75)
XP4A_23: U1.A16 XP4.A23 | length 725.9
  Bottom Layer w5: U1.A16@2618.11,3271.07 2657.48,3271.07 2813.78,3114.77 3198.82,3114.77 3209.05,3125.01 XP4.A23@3275,3125.01
XP4A_24: U1.E13 XP4.A24 | length 862.8
  Mid-Layer 1 w5: v1(2480.33,3133.27) 2499.84,3152.78 2942.91,3152.78 3020.69,3075.01 XP4.A24@3275,3075.01
  Bottom Layer w6: U1.E13@2460.63,3152.96 v1(2480.33,3133.27)
XP4A_25: U1.A15 XP4.A25 | length 767
  Mid-Layer 4 w5: v1(2637.8,3212.01) 2667.32,3241.54 2952.76,3241.54 3169.29,3025.01 XP4.A25@3275,3025.01
  Bottom Layer w6: U1.A15@2618.11,3231.7 v1(2637.8,3212.01)
XP4A_26: U1.F10 XP4.A26 | length 894.7
  Mid-Layer 1 w5: v1(2440.94,3015.15) 2460.47,3034.67 2913.39,3034.67 2972.45,2975.61 3178.53,2975.61 3179.13,2975.01 XP4.A26@3275,2975.01
  Bottom Layer w6: U1.F10@2421.26,3034.85 v1(2440.94,3015.15)
XP4A_27: U1.L19 XP4.A27 | length 1328.7
  Mid-Layer 2 w5: v1(2244.09,3408.84) 2263.78,3389.15 2263.78,3270.41 2283.46,3250.72 2876.62,3250.72 3202.34,2925.01 XP4.A27@3275,2925.01
  Bottom Layer w6: U1.L19@2224.41,3389.18 v1(2244.09,3408.84)
XP4A_28: U1.F14 XP4.A28 | length 1001.3
  Mid-Layer 5 w5: v1(2440.94,3172.63) 2460.45,3192.14 2903.73,3192.14 3220.87,2875.01 XP4.A28@3275,2875.01
  Bottom Layer w6: U1.F14@2421.26,3192.32 v1(2440.94,3172.63)
XP4A_29: U1.J13 XP4.A29 | length 1111.2
  Mid-Layer 4 w5: v1(2322.84,3133.27) 2342.71,3113.4 2842.72,3113.4 2854.15,3101.98 2854.15,3096.04 3092.69,2857.5 3242.51,2857.5 XP4.A29@3275,2825.01
  Bottom Layer w6: U1.J13@2303.15,3152.96 v1(2322.84,3133.27)
XP4A_30: U1.L12 XP4.A30 | length 1199.2
  Mid-Layer 4 w5: v1(2244.09,3093.9) 2263.96,3074.03 2824.99,3074.03 3124.02,2775.01 XP4.A30@3275,2775.01 XP4.A30@3269.09,2769.1
  Bottom Layer w6: U1.L12@2224.41,3113.59 v1(2244.09,3093.9)
XP4A_31: U1.A7 XP4.A31 | length 769.2
  Bottom Layer w5: U1.A7@2618.11,2916.74 2618.11,2916.42 2657.16,2916.42 2696.67,2955.92 2992.31,2955.92 3223.23,2725.01 XP4.A31@3275,2725.01
XP4A_32: U1.B7 XP4.A32 | length 812.4
  Bottom Layer w5: U1.B7@2578.74,2916.74 2598.1,2897.38 2671.59,2897.38 2690.94,2916.74 2925.18,2916.74 3166.91,2675.01 XP4.A32@3275,2675.01
XP4A_33: U1.A6 XP4.A33 | length 761.4
  Bottom Layer w5: U1.A6@2618.11,2877.37 2901.59,2877.37 3153.96,2625.01 XP4.A33@3275,2625.01
XP4A_34: U1.A5 XP4.A34 | length 765.8
  Bottom Layer w5: U1.A5@2618.11,2838 2669.27,2838 2708.46,2798.81 2824.62,2798.81 3048.43,2575.01 XP4.A34@3275,2575.01
XP4A_35: U1.B5 XP4.A35 | length 852.8
  Bottom Layer w5: 2597.75,2818.98 U1.B5@2578.74,2838 2598.75,2817.99 2638.79,2817.99 2697.71,2759.07 2805.3,2759.07 3039.37,2525.01 XP4.A35@3275,2525.01
XP4A_36: U1.A3 XP4.A36 | length 790.8
  Mid-Layer 1 w5: v1(2637.8,2739.57) 2657.48,2719.89 2657.48,2692.31 2836.6,2513.19 3236.81,2513.19 XP4.A36@3275,2475.01
  Bottom Layer w6: U1.A3@2618.11,2759.26 v1(2637.8,2739.57)
XP4A_37: U1.E4 XP4.A37 | length 985.4
  Mid-Layer 4 w5: v1(2480.33,2778.93) 2500.02,2798.63 2834.65,2798.63 3208.27,2425.01 XP4.A37@3275,2425.01
  Bottom Layer w6: U1.E4@2460.64,2798.62 v1(2480.33,2778.93)
XP4A_38: U1.D3 XP4.A38 | length 1052.9
  Mid-Layer 1 w5: v1(2519.7,2739.56) 2519.7,2591.92 2775.59,2336.03 3080.71,2336.03 3119.68,2375.01 XP4.A38@3275,2375.01
  Bottom Layer w6: U1.D3@2500,2759.26 v1(2519.7,2739.56)
XP4B_3: U1.K30 XP4.B3 | length 1228.1
  Mid-Layer 7 w5: v1(2283.46,3841.93) 2381.89,3940.36 2748.01,3940.36 2982.66,4175.01 3223.03,4175.01 3248.03,4150.01 3300,4150.01 XP4.B3@3325,4125.01
  Bottom Layer w6: U1.K30@2263.78,3822.25 v1(2283.46,3841.93)
XP4B_4: U1.F27 XP4.B4 | length 1173.3
  Mid-Layer 1 w5: v1(2440.94,3723.82) 2460.82,3743.69 2460.82,3881.49 2480.32,3900.99 2687.01,3900.99 2903.54,4117.53 3218.5,4117.53 3236.52,4099.51 3300.5,4099.51 XP4.B4@3325,4075.01
  Bottom Layer w6: U1.F27@2421.26,3704.14 v1(2440.94,3723.82)
XP4B_5: U1.D30 XP4.B5 | length 939.8
  Mid-Layer 5 w5: v1(2519.68,3841.93) 2519.68,3881.3 2539.37,3900.99 3129.92,3900.99 3228.44,3999.51 3285.15,3999.51 3285.24,3999.41 3299.41,3999.41 XP4.B5@3325,4025.01 XP4.B5@3325,4017.33
  Bottom Layer w6: U1.D30@2500,3822.25 v1(2519.68,3841.93)
XP4B_6: U1.C27 XP4.B6 | length 942.5
  Mid-Layer 1 w5: v1(2559.06,3723.82) 2704.74,3723.82 2736.04,3755.12 2736.04,3755.82 2999.31,4019.1 3139.65,4019.1 3167.49,3991.26 3200.5,3991.26 3209.25,4000.01 3298.81,4000.01 XP4.B6@3325,3973.82
  Bottom Layer w6: U1.C27@2539.38,3704.13 v1(2559.06,3723.82)
XP4B_7: U1.B29 XP4.B7 | length 805.1
  Bottom Layer w5: U1.B29@2578.74,3782.88 2598.43,3802.56 2775.59,3802.56 2873.03,3900.01 3300,3900.01 XP4.B7@3325,3925.01
XP4B_8: U1.E25 XP4.B8 | length 1004.6
  Mid-Layer 1 w5: v1(2480.33,3645.07) 2499.83,3625.57 2725.88,3625.57 2726.38,3626.07 2776.26,3626.07 3050.2,3900.01 3300,3900.01 XP4.B8@3325,3875.01
  Bottom Layer w6: U1.E25@2460.63,3625.4 v1(2480.33,3645.07)
XP4B_9: U1.F28 XP4.B9 | length 974.1
  Mid-Layer 5 w5: v1(2440.94,3763.19) 2460.62,3743.51 2893.7,3743.51 2950.7,3800.51 3215.85,3800.51 3264.85,3849.51 3300.5,3849.51 XP4.B9@3325,3825.01
  Bottom Layer w6: U1.F28@2421.26,3743.51 v1(2440.94,3763.19)
XP4B_10: U1.E27 XP4.B10 | length 930.2
  Mid-Layer 5 w5: v1(2480.33,3723.82) 2499.83,3704.32 3021.65,3704.32 3086.34,3769.01 3224.32,3769.01 3254.81,3799.51 3300.5,3799.51 XP4.B10@3325,3775.01
  Bottom Layer w6: U1.E27@2460.63,3704.14 v1(2480.33,3723.82)
XP4B_11: U1.F22 XP4.B11 | length 1030.8
  Mid-Layer 1 w5: v1(2440.94,3526.97) 2460.45,3507.46 2882.08,3507.46 3124.62,3750.01 3300,3750.01 XP4.B11@3325,3725.01
  Bottom Layer w6: U1.F22@2421.26,3507.29 v1(2440.94,3526.97)
XP4B_12: U1.F21 XP4.B12 | length 1026.9
  Mid-Layer 1 w5: v1(2440.94,3487.6) 2460.45,3468.09 2893.87,3468.09 3125.79,3700.01 3298.82,3700.01 XP4.B12@3325,3673.82
  Bottom Layer w6: U1.F21@2421.26,3467.92 v1(2440.94,3487.6)
XP4B_13: U1.D24 XP4.B13 | length 879
  Mid-Layer 5 w5: v1(2519.69,3605.7) 2539.37,3586.03 3129.92,3586.03 3193.4,3649.51 3302.67,3649.51 3325,3627.17 XP4.B13@3325,3625.01
  Bottom Layer w6: U1.D24@2500.01,3586.02 v1(2519.69,3605.7)
XP4B_14: U1.F18 XP4.B14 | length 997
  Mid-Layer 1 w5: v1(2440.94,3369.48) 2460.45,3388.99 2942.73,3388.99 3103.74,3550.01 3300,3550.01 XP4.B14@3325,3575.01
  Bottom Layer w6: U1.F18@2421.26,3349.81 v1(2440.94,3369.48)
XP4B_15: U1.E17 XP4.B15 | length 953.6
  Mid-Layer 1 w5: v1(2480.33,3330.12) 2499.84,3349.63 2960.47,3349.63 3110.24,3499.4 3110.24,3500.01 3300,3500.01 XP4.B15@3325,3525.01
  Bottom Layer w6: U1.E17@2460.63,3310.44 v1(2480.33,3330.12)
XP4B_16: U1.G22 XP4.B16 | length 993.5
  Mid-Layer 4 w5: v1(2401.58,3526.97) 2421.08,3546.47 2706.19,3546.47 ; 2706.2,3546.47 3199,3546.47 3245.47,3500.01 3300,3500.01 XP4.B16@3325,3475.01 XP4.B16@3325,3479.53
  Bottom Layer w6: U1.G22@2381.89,3507.29 v1(2401.58,3526.97)
XP4B_17: U1.K19 XP4.B17 | length 1184.3
  Mid-Layer 4 w5: v1(2283.47,3408.84) 2303.15,3428.52 2303.15,3497.26 2312.99,3507.1 3169.48,3507.1 3226.57,3450.01 3300,3450.01 XP4.B17@3325,3425.01
  Bottom Layer w6: U1.K19@2263.78,3389.18 v1(2283.47,3408.84)
XP4B_18: U1.G16 XP4.B18 | length 1097
  Mid-Layer 4 w5: v1(2401.58,3290.75) 2382.08,3310.25 2382.08,3377.56 2393.69,3389.18 2393.88,3388.99 3139.95,3388.99 3178.94,3350.01 3300,3350.01 XP4.B18@3325,3375.01
  Bottom Layer w6: U1.G16@2381.89,3271.07 v1(2401.58,3290.75)
XP4B_19: U1.J14 XP4.B19 | length 1180
  Mid-Layer 1 w5: v1(2322.84,3172.63) 2303.34,3192.13 2303.34,3231.89 2322.83,3251.38 3149.61,3251.38 3248.03,3349.81 3307.09,3349.81 3325,3331.9 XP4.B19@3325,3325.01
  Bottom Layer w6: U1.J14@2303.16,3192.32 v1(2322.84,3172.63)
XP4B_22: U1.A17 XP4.B22 | length 784.1
  Bottom Layer w5: U1.A17@2618.11,3310.44 2618.11,3310.75 2686.44,3310.75 2847.18,3150.01 3300,3150.01 XP4.B22@3325,3175.01
XP4B_23: U1.F19 XP4.B23 | length 1031.4
  Mid-Layer 2 w5: v1(2440.94,3408.84) 2460.6,3389.18 3028.13,3389.18 3079.52,3337.79 3079.52,3335.83 3264.85,3150.51 3266.8,3150.51 3267.3,3150.01 3300,3150.01 XP4.B23@3325,3125.01 ; XP4.B23@3324.41,3124.41 XP4.B23@3325,3123.82
  Bottom Layer w6: U1.F19@2421.26,3389.18 v1(2440.94,3408.84)
XP4B_24: U1.G12 XP4.B24 | length 996
  Mid-Layer 1 w5: v1(2401.58,3093.9) 2421.09,3113.41 2933.07,3113.41 2996.47,3050.01 3300,3050.01 XP4.B24@3325,3075.01
  Bottom Layer w6: U1.G12@2381.89,3113.59 v1(2401.58,3093.9)
XP4B_25: U1.E11 XP4.B25 | length 920.6
  Mid-Layer 1 w5: v1@2480.33,3057.03 2497.34,3074.04 2931.3,3074.04 3005.33,3000.01 3300,3000.01 XP4.B25@3325,3025.01
  Bottom Layer w6: U1.E11@2460.63,3074.22 v1(2480.33,3054.53)
XP4B_26: U1.G9 XP4.B26 | length 999.7
  Mid-Layer 1 w5: v1(2401.58,2975.78) 2421.08,2995.28 2903.74,2995.28 2962.6,2936.42 3214.76,2936.42 3228.35,2950.01 3300,2950.01 XP4.B26@3325,2975.01
  Bottom Layer w6: U1.G9@2381.89,2995.48 v1(2401.58,2975.78)
XP4B_27: U1.C8 XP4.B27 | length 835.4
  Mid-Layer 1 w5: v1(2559.06,2936.42) 2578.57,2955.92 2884.04,2955.92 2939.64,2900.32 3150,2900.32 3150.32,2900.01 3300,2900.01 XP4.B27@3325,2925.01
  Bottom Layer w6: U1.C8@2539.38,2956.1 v1(2559.06,2936.42)
XP4B_28: U1.D8 XP4.B28 | length 879.3
  Mid-Layer 1 w5: v1(2519.69,2936.42) 2539.55,2916.56 2854.51,2916.56 2913.57,2857.5 3039.57,2857.5 3046.75,2850.32 3175,2850.32 3175.32,2850.01 3300,2850.01 XP4.B28@3325,2875.01
  Bottom Layer w6: U1.D8@2500,2956.11 v1(2519.69,2936.42)
XP4B_29: U1.D7 XP4.B29 | length 884.7
  Mid-Layer 1 w5: v1(2519.69,2897.05) 2539.43,2877.31 2834.89,2877.31 2913.39,2798.81 3109.04,2798.81 3110.24,2800.01 3300,2800.01 XP4.B29@3325,2825.01
  Bottom Layer w6: U1.D7@2500,2916.74 v1(2519.69,2897.05)
XP4B_30: U1.C6 XP4.B30 | length 848.7
  Mid-Layer 1 w5: v1(2559.06,2857.68) 2804.75,2857.68 2903.36,2759.07 3101.17,2759.07 3110.24,2750.01 3300,2750.01 XP4.B30@3325,2775.01
  Bottom Layer w6: U1.C6@2539.38,2877.37 v1(2559.06,2857.68)
XP4B_31: U1.D6 XP4.B31 | length 909
  Mid-Layer 1 w5: v1(2519.69,2857.68) 2539.32,2838.05 2551.05,2838.05 ; 2551.05,2837.82 2764.01,2837.82 ; 2763.78,2838.05 2764.01,2837.82 ; XP4.B31@3325,2725.01 3300,2700.01 2901.83,2700.01 2764.01,2837.82
  Bottom Layer w6: U1.D6@2500,2877.37 v1(2519.69,2857.68)
XP4B_32: U1.C5 XP4.B32 | length 874.3
  Mid-Layer 1 w5: v1(2559.06,2818.3) 2559.58,2818.82 2686.5,2818.82 2706.69,2798.63 2746.06,2798.63 2878.35,2666.34 3172.64,2666.34 3188.98,2650.01 3300,2650.01 XP4.B32@3325,2675.01
  Bottom Layer w6: U1.C5@2539.38,2837.98 v1(2559.06,2818.3)
XP4B_33: U1.D5 XP4.B33 | length 960.4
  Mid-Layer 1 w5: v1(2519.69,2818.3) 2539.43,2798.56 2618.17,2798.56 2637.8,2778.94 2704.74,2778.94 ; 2696.85,2778.94 2704.74,2778.94 ; 3218.5,2600.01 3218.18,2600.32 3200,2600.32 ; XP4.B33@3325,2625.01 3300,2600.01 3200.32,2600.01 3200,2600.32 ; 2704.74,2778.94 2846.87,2636.82 3152.48,2636.82 3188.98,2600.32 3200,2600.32
  Bottom Layer w6: U1.D5@2500,2838 v1(2519.69,2818.3)
XP4B_34: U1.C4 XP4.B34 | length 898.5
  Mid-Layer 1 w5: v1(2559.06,2778.93) 2560.18,2778.93 v1@2560.24,2778.87 ; v1@2560.18,2778.81 2579.68,2759.31 2657.43,2759.31 2864.36,2552.38 2891.94,2552.38 2894.31,2550.01 3301.18,2550.01 XP4.B34@3325,2573.82
  Bottom Layer w6: U1.C4@2539.38,2798.62 v1(2559.06,2778.93)
XP4B_35: U1.E5 XP4.B35 | length 1010.2
  Mid-Layer 4 w5: v1(2480.33,2818.3) 2499.84,2837.81 2884.04,2837.81 3171.85,2550.01 3300,2550.01 XP4.B35@3325,2525.01
  Bottom Layer w6: U1.E5@2460.63,2838 v1(2480.33,2818.3)
XP4B_36: U1.B2 XP4.B36 | length 884.5
  Mid-Layer 1 w5: v1(2598.43,2700.2) 2598.43,2672.63 2821.55,2449.51 3299.5,2449.51 ; 3300.5,2450.51 XP4.B36@3325,2475.01
  Bottom Layer w6: U1.B2@2578.74,2719.89 v1@2599.11,2699.52
XP4B_37: U1.D4 XP4.B37 | length 1058.5
  Mid-Layer 1 w5: v1(2519.69,2778.93) 2539.56,2759.07 2539.56,2745.28 2539.56,2660.65 2800.7,2399.51 3299.5,2399.51 XP4.B37@3325,2425.01
  Bottom Layer w6: U1.D4@2500.01,2798.62 v1(2519.69,2778.93)
XP4B_38: U1.A2 XP4.B38 | length 882.4
  Bottom Layer w5: v1(2637.8,2700.2) 2706.69,2700.2 2775.59,2631.3 2775.59,2611.62 2982.28,2404.93 3041.34,2404.93 3096.76,2349.51 3299.5,2349.51 XP4.B38@3325,2375.01
  Bottom Layer w6: U1.A2@2618.11,2719.89 v1(2637.8,2700.2)
XP4C_3: U1.H30 XP4.C3 | length 1157.9
  Mid-Layer 7 w5: v1(2362.2,3841.93) 2381.89,3861.62 2936.99,3861.62 3175.38,4100.01 3350,4100.01 XP4.C3@3375,4125.01
  Bottom Layer w6: U1.H30@2342.52,3822.25 v1(2362.2,3841.93)
XP4C_4: U1.J29 XP4.C4 | length 1192.9
  Mid-Layer 7 w5: v1(2322.83,3802.56) 2342.46,3822.19 2952.7,3822.19 3180.51,4050.01 3350,4050.01 XP4.C4@3375,4075.01
  Bottom Layer w6: U1.J29@2303.15,3782.88 v1(2322.83,3802.56)
XP4C_5: U1.D27 XP4.C5 | length 1039
  Mid-Layer 1 w5: v1(2519.69,3723.82) 2539.45,3743.57 2657.54,3743.57 2746.06,3832.09 2746.06,3849.83 2875.97,3979.73 2903.54,3979.73 2973.82,4050.01 3350,4050.01 XP4.C5@3375,4025.01
  Bottom Layer w6: U1.D27@2500,3704.14 v1(2519.69,3723.82)
XP4C_6: U1.A28 XP4.C6 | length 877.2
  Mid-Layer 2 w5: v1(2637.8,3763.19) 2667.32,3733.67 2854.33,3733.67 3070.17,3949.51 3349.5,3949.51 XP4.C6@3375,3975.01
  Bottom Layer w6: U1.A28@2618.11,3743.51 v1(2637.8,3763.19)
XP4C_7: U1.D26 XP4.C7 | length 1019.7
  Mid-Layer 1 w5: v1(2519.69,3684.45) 2539.2,3664.94 2765.92,3664.94 3050.98,3950.01 3350,3950.01 XP4.C7@3375,3925.01
  Bottom Layer w6: U1.D26@2500,3664.77 v1(2519.69,3684.45)
XP4C_8: U1.C29 XP4.C8 | length 906.9
  Mid-Layer 5 w5: v1@2561.59,3800.01 v1(2559.06,3802.55) 2893.68,3802.55 2913.39,3822.25 3169.29,3822.25 3246.55,3899.51 3350.5,3899.51 XP4.C8@3375,3875.01 XP4.C8@3375,3870.48
  Bottom Layer w6: U1.C29@2539.38,3782.87 v1(2559.06,3802.55) v1@2562.39,3805.88
XP4C_9: U1.A29 XP4.C9 | length 774.3
  Bottom Layer w5: U1.A29@2618.11,3782.88 3211.22,3782.88 3228.35,3800.01 3350,3800.01 XP4.C9@3375,3825.01
XP4C_10: U1.B27 XP4.C10 | length 825.6
  Bottom Layer w5: U1.B27@2578.74,3704.14 2598.11,3723.51 2627.95,3723.51 2647.95,3743.51 3070.87,3743.51 3077.36,3750.01 3350,3750.01 XP4.C10@3375,3775.01
XP4C_11: U1.A27 XP4.C11 | length 769.4
  Bottom Layer w5: 3056.57,3704.45 3061.02,3700.01 3350,3700.01 XP4.C11@3375,3725.01
  Bottom Layer w6: U1.A27@2618.11,3704.14 2618.11,3704.45 3056.57,3704.45
XP4C_12: U1.F24 XP4.C12 | length 1019
  Mid-Layer 2 w5: v1(2440.96,3605.7) 2460.45,3625.2 2460.45,3652.78 2472.44,3664.77 3185.24,3664.77 3200,3650.01 3350,3650.01 XP4.C12@3375,3675.01
  Bottom Layer w6: U1.F24@2421.26,3586.02 v1(2440.96,3605.7)
XP4C_13: U1.E24 XP4.C13 | length 952.1
  Mid-Layer 2 w5: v1(2480.32,3605.71) 2499.82,3625.22 3174.78,3625.22 3200,3600.01 3351.18,3600.01 3375,3623.83 XP4.C13@3375,3625.01
  Bottom Layer w6: U1.E24@2460.64,3586.02 v1(2480.32,3605.71)
XP4C_14: U1.F23 XP4.C14 | length 995.2
  Mid-Layer 2 w5: v1(2440.94,3566.33) 2460.45,3585.84 3152.32,3585.84 3188.16,3550.01 3350,3550.01 XP4.C14@3375,3575.01
  Bottom Layer w6: U1.F23@2421.26,3546.66 v1(2440.94,3566.33)
XP4C_15: U1.H21 XP4.C15 | length 1110.8
  Mid-Layer 2 w5: v1(2362.21,3487.6) 2381.71,3507.1 2381.71,3534.68 2393.51,3546.48 3139.94,3546.48 3186.42,3500.01 3350,3500.01 XP4.C15@3375,3525.01
  Bottom Layer w6: U1.H21@2342.52,3467.92 v1(2362.21,3487.6)
XP4C_16: U1.E16 XP4.C16 | length 998.9
  Mid-Layer 1 w5: v1(2480.33,3290.75) 2500,3310.44 3070.87,3310.44 3210.93,3450.51 3350.5,3450.51 XP4.C16@3375,3475.01
  Bottom Layer w6: U1.E16@2460.63,3271.07 v1(2480.33,3290.75)
XP4C_17: U1.H19 XP4.C17 | length 1119.6
  Mid-Layer 4 w5: v1(2362.2,3408.84) 2382.05,3428.69 2382.05,3456.25 2393.53,3467.73 3162.49,3467.73 3230.22,3400.01 3350,3400.01 XP4.C17@3375,3425.01
  Bottom Layer w6: U1.H19@2342.52,3389.18 v1(2362.2,3408.84)
XP4C_18: U1.K14 XP4.C18 | length 1297.8
  Mid-Layer 1 w5: v1@2283.16,3172.95 v1(2283.48,3172.63) 2263.98,3192.13 2263.98,3251.58 2283.46,3271.07 3106.82,3271.07 3235.25,3399.51 3350.5,3399.51 XP4.C18@3375,3375.01
  Bottom Layer w6: U1.K14@2263.79,3192.32 v1(2283.48,3172.63)
XP4C_19: U1.G20 XP4.C19 | length 1089.2
  Mid-Layer 2 w5: v1(2401.57,3448.19) 2421.12,3467.74 3051.18,3467.74 3218.92,3300.01 3350,3300.01 XP4.C19@3375,3325.01
  Bottom Layer w6: U1.G20@2381.89,3428.52 v1(2401.57,3448.19)
XP4C_22: U1.G14 XP4.C22 | length 1132.7
  Mid-Layer 1 w5: v1@2401.13,3173.08 v1(2401.58,3172.63) ; v1@2401.32,3173.26 2382.07,3192.51 2382.07,3231.51 2381.89,3231.7 2421.26,3231.7 3031.5,3231.7 3112.69,3150.51 3350.5,3150.51 XP4.C22@3375,3175.01 ; XP4.C22@3375,3173.82 XP4.C22@3375.59,3174.42
  Bottom Layer w6: U1.G14@2381.89,3192.32 v1(2401.58,3172.63)
XP4C_23: U1.G17 XP4.C23 | length 1122.8
  Mid-Layer 2 w5: v1(2401.58,3330.12) 2421.09,3349.63 2836.8,3349.63 2836.98,3349.81 2984.97,3349.81 2985.15,3349.62 2990.36,3349.62 3239.48,3100.51 3350.5,3100.51 XP4.C23@3375,3125.01
  Bottom Layer w6: U1.G17@2381.89,3310.44 v1(2401.58,3330.12)
XP4C_24: U1.H17 XP4.C24 | length 1167
  Mid-Layer 2 w5: v1(2362.21,3330.12) 2363.86,3330.12 2383.71,3310.26 2952.93,3310.26 3213.19,3050.01 3350,3050.01 XP4.C24@3375,3075.01
  Bottom Layer w6: U1.H17@2342.52,3310.44 v1(2362.21,3330.12)
XP4C_25: U1.H16 XP4.C25 | length 1150.7
  Mid-Layer 4 w5: v1(2362.21,3290.75) 2381.89,3271.07 3001.97,3271.07 3223.53,3049.51 3350.5,3049.51 XP4.C25@3375,3025.01
  Bottom Layer w6: U1.H16@2342.52,3271.07 v1(2362.21,3290.75)
XP4C_26: U1.J18 XP4.C26 | length 1282.6
  Mid-Layer 2 w5: v1(2322.84,3369.48) 2342.7,3349.63 2342.7,3320.28 2342.71,3282.67 2355.66,3269.72 2934.41,3269.72 3204.13,3000.01 3350,3000.01 XP4.C26@3375,2975.01
  Bottom Layer w6: U1.J18@2303.15,3349.81 v1(2322.84,3369.48)